# Altium PCB Ararinha_PCB.PcbDoc (part 1 of 2)
Units mm, origin at the board's own origin, x right, y up, seen from the top; angles counter-clockwise.
Board outline 118.49 x 71.75 mm, 4 copper layers (Component Side, GND, VCC, Solder Side), stack 0.844 mm thick; 218 components, 109 nets, 598 pads, 337 vias.
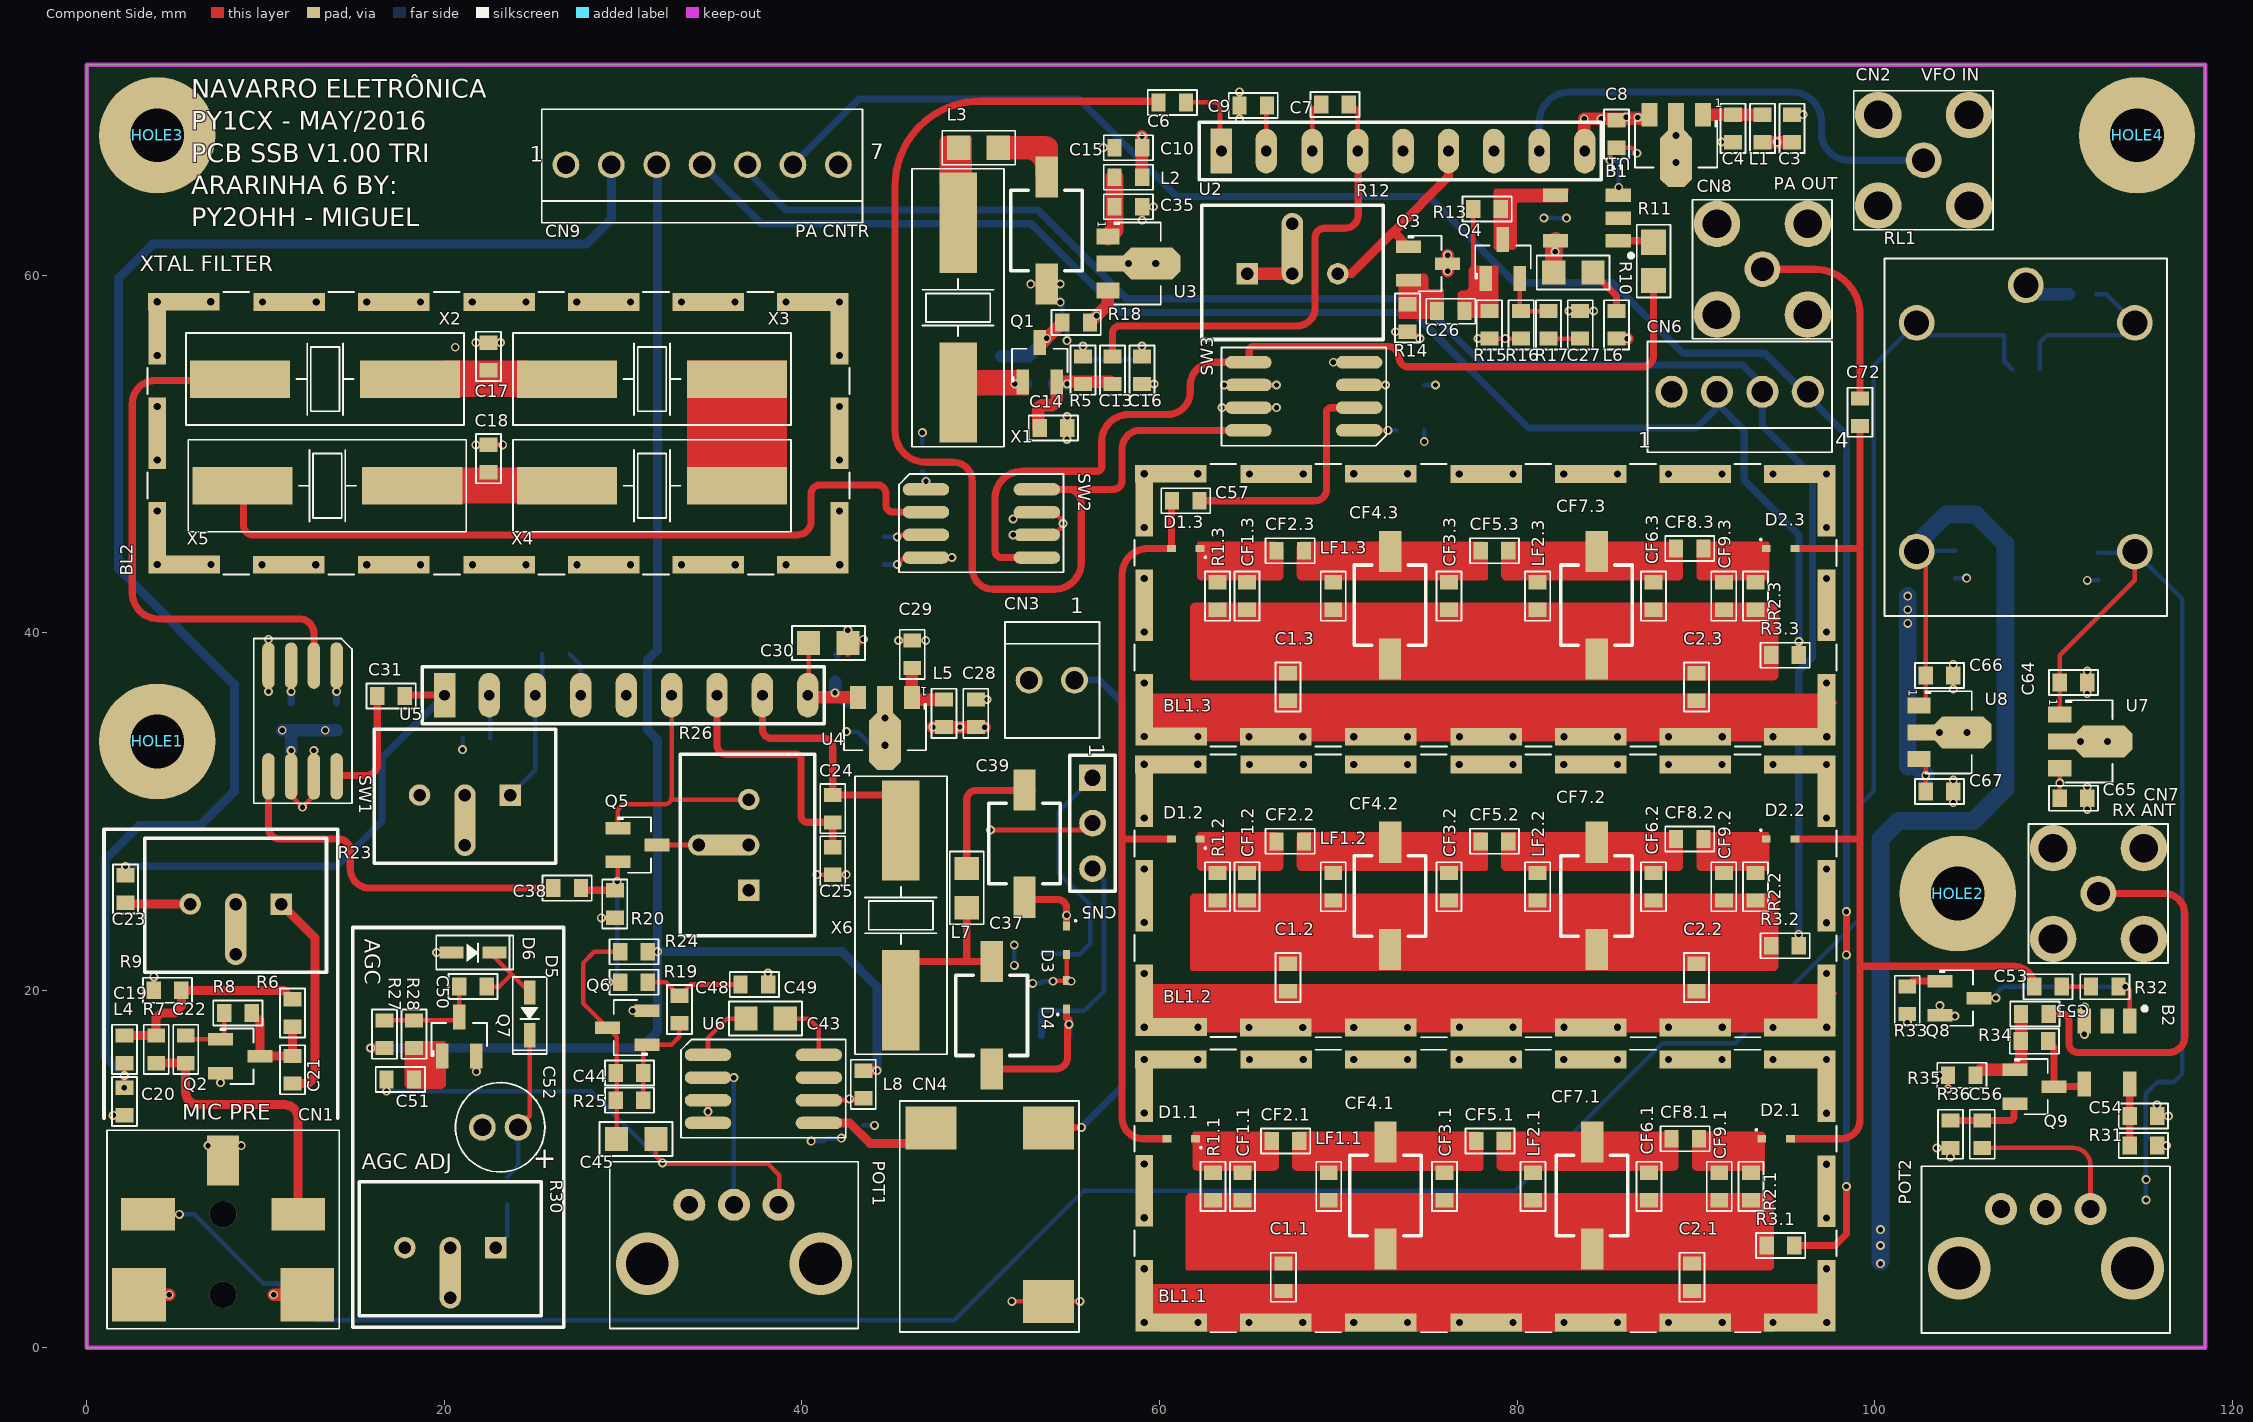
[diagram p0: Component Side view]
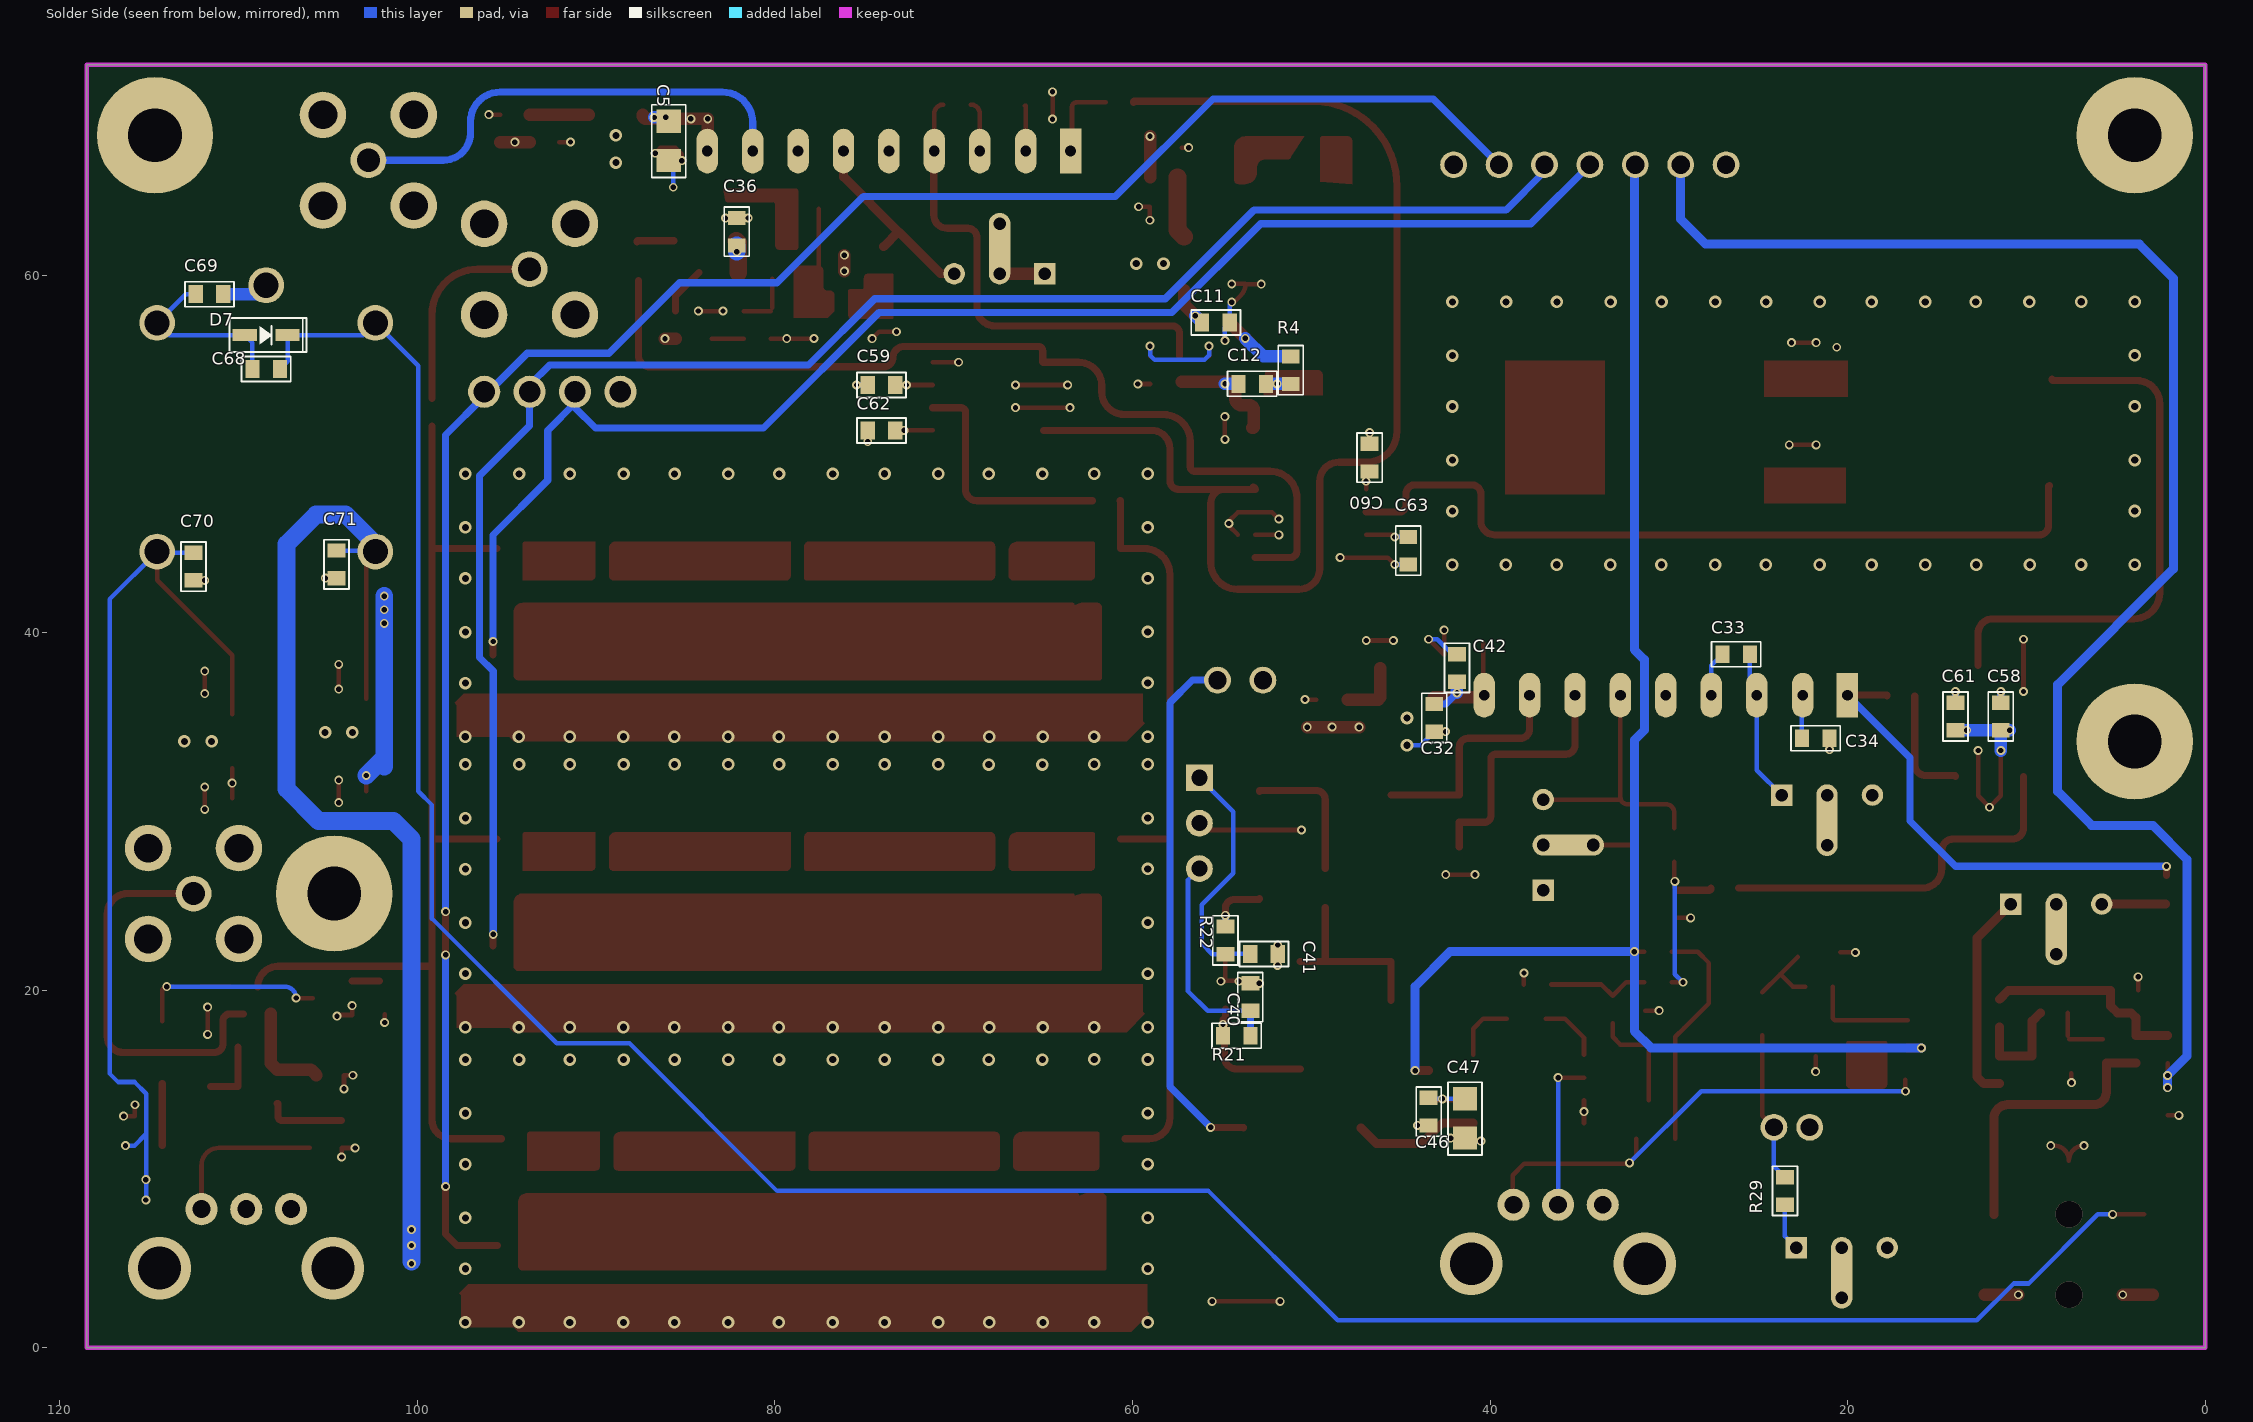
[diagram p1: Solder Side view, seen from below]
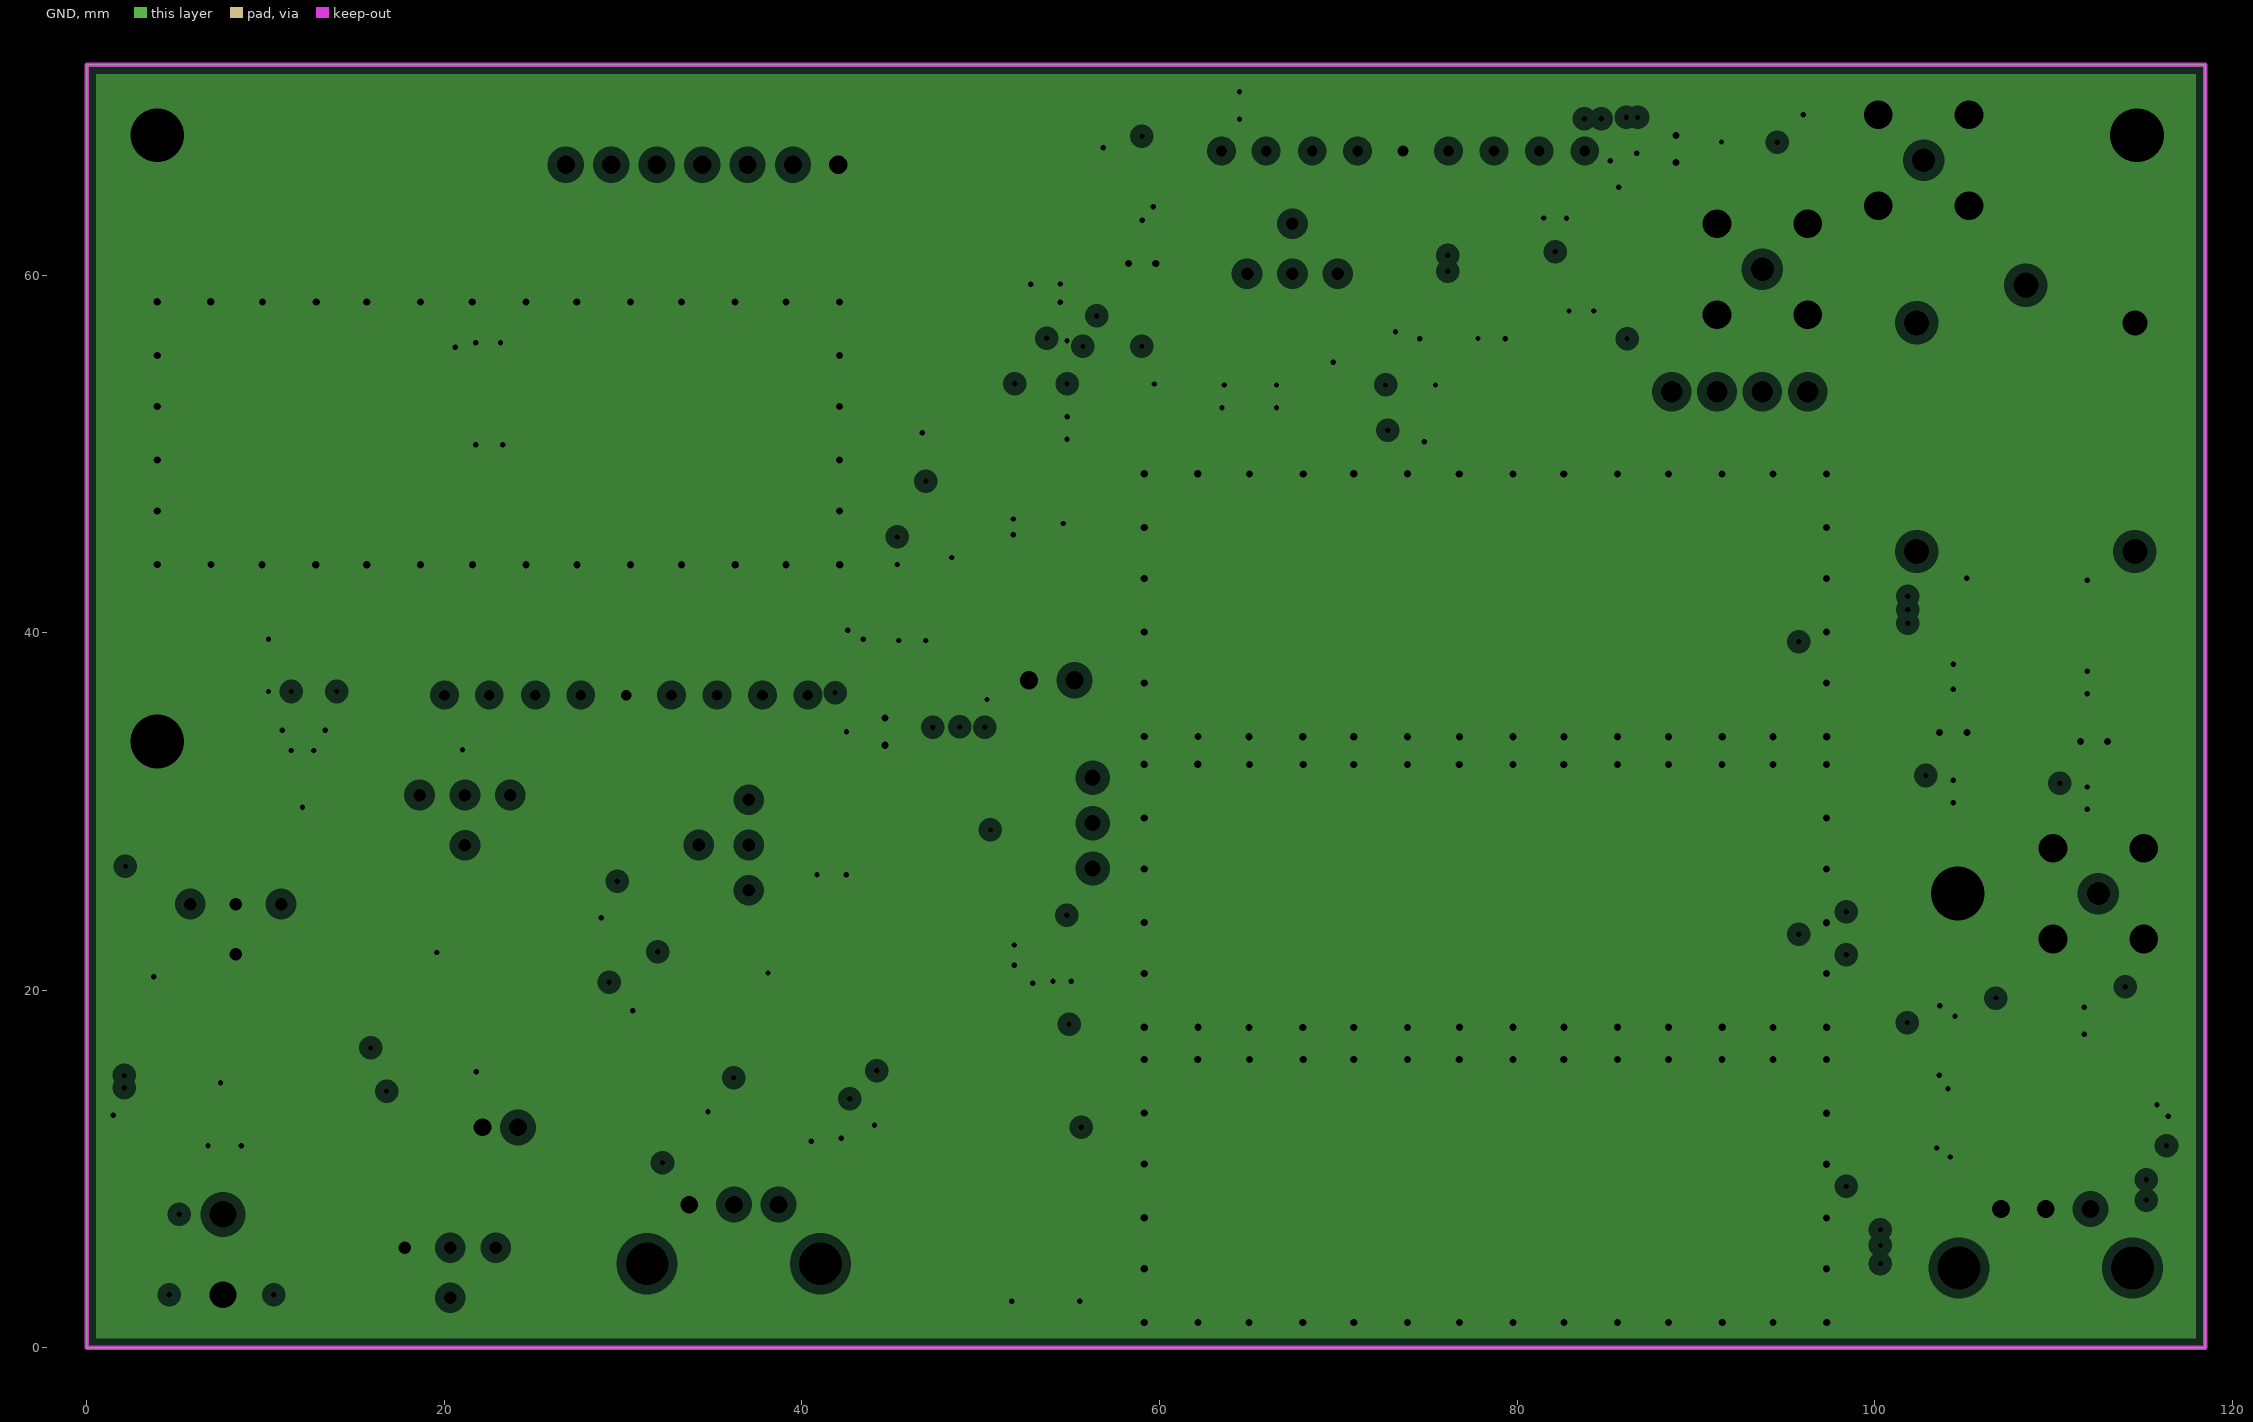
[diagram p2: GND, clearances drawn from the general rule]
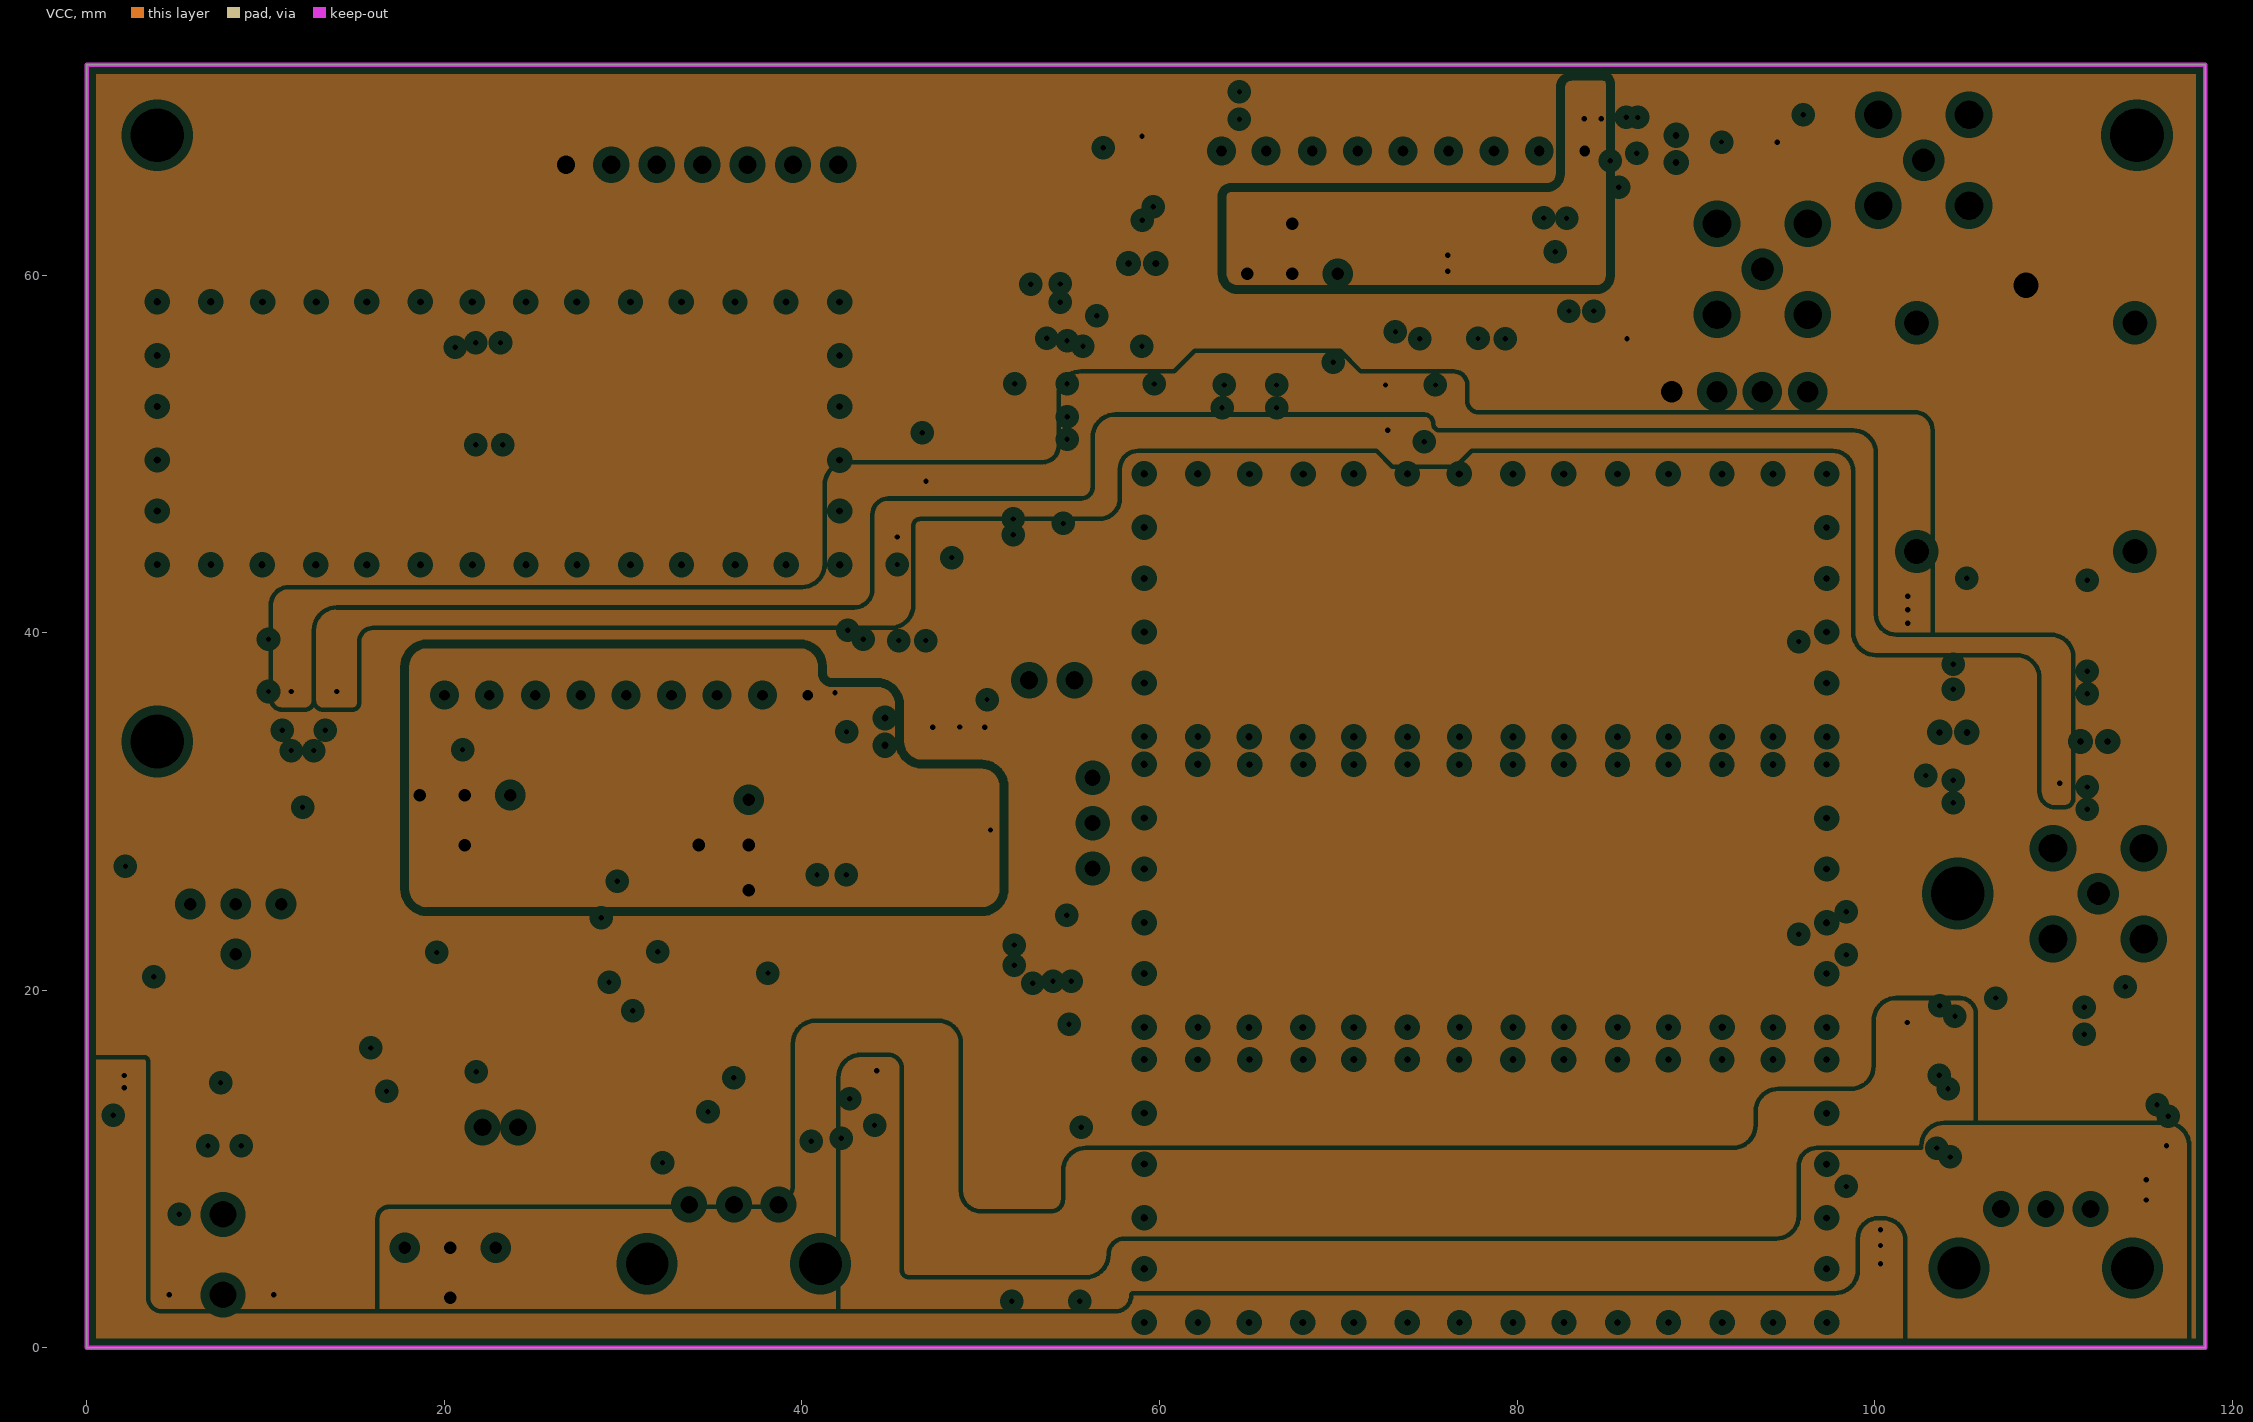
[diagram p3: VCC, clearances drawn from the general rule]

## Layer stack, top to bottom
Top Solder: solder mask 0.0102, Solder Resist, Dk 3.5
Component Side: signal copper 0.0356
Dielectric 1: core 0.32, FR-4, Dk 4.8
GND: plane copper 0.036, net GND
Dielectric 3: prepreg 0.127, Dk 4.2
VCC: plane copper 0.036, net (Multiple Nets)
Dielectric 4: core 0.254, Dk 4.2
Solder Side: signal copper 0.0356
Bottom Solder: solder mask 0.0102, Solder Resist, Dk 3.5

## Board outline
0,0 118.491,0 118.491,71.755 0,71.755

## Design rules (kind name [scope] priority, off if disabled: settings)
Clearance [HasFootprint('SHIELD_26.5X26.5')] p1: gap=0
Clearance Clearance_1 [All] p2: gap=0.254
HoleSize [All] p1: absolutevalues=TRUE maxlimit=5 minlimit=0.025 maxpercent=80.000 minpercent=20.000
MinimumSolderMaskSliver [All] p1 off: minsoldermaskwidth=0.254
PlaneClearance [All] p1: clearance=0.508
PlaneConnect [All] p1: planeconnectstyle=Direct reliefexpansion=0.508 reliefentries=4 reliefconductorwidth=0.254 reliefairgap=0.254
PolygonConnect [All] p1: connectstyle=Relief reliefconductorwidth=0.254 reliefentries=4 polygonreliefangle="90 Angle" airgapwidth=0.254
RoomDefinition XtalFilter [InComponentClass('XtalFilter')] p1: confinementstyle=ConfineIn formatcopy=TRUE lockcomponents=FALSE outline 1.559,42.384 43.596,42.384 43.596,61.434 1.559,61.434
RoutingVias [All] p1: holewidth=0.711 width=1.27 viastyle="Through Hole" minholewidth=0.711 minwidth=1.27 maxholewidth=0.711 maxwidth=1.27
SilkToSilkClearance [All] p1 off: silktosilkclearance=0.1
SilkToSolderMaskClearance [IsPad] p1 off: minsilkscreentomaskgap=0.1 clearancetoexposedcopper=TRUE
SolderMaskExpansion [All] p1: expansion=0.102
Width [All] p1: maxlimit=1 minlimit=0.254 preferedwidth=0.254 minimp=50.000000 maximp=50.000000 favimp=50.000000
24 further rules are at their usual default settings.

## Classes and differential pairs
net class CNTR[1..3]: CNTR1 CNTR2 CNTR3
channel class BPF: BPF1 BPF2 BPF3
component class BPF3: BL1.3 C1.3 C2.3 CF1.3 CF2.3 CF3.3 CF4.3 CF5.3 CF6.3 CF7.3 CF8.3 CF9.3 D1.3 D2.3 LF1.3 LF2.3 R1.3 R2.3 R3.3
component class BPF2: BL1.2 C1.2 C2.2 CF1.2 CF2.2 CF3.2 CF4.2 CF5.2 CF6.2 CF7.2 CF8.2 CF9.2 D1.2 D2.2 LF1.2 LF2.2 R1.2 R2.2 R3.2
component class BPF1: BL1.1 C1.1 C2.1 CF1.1 CF2.1 CF3.1 CF4.1 CF5.1 CF6.1 CF7.1 CF8.1 CF9.1 D1.1 D2.1 LF1.1 LF2.1 R1.1 R2.1 R3.1
component class IF: C19 C20 C21 C22 C23 C24 C25 C28 C29 C30 C31 C32 C33 C34 C37 C38 C39 C40 C41 C42 C43 C44 C45 C46 C47 C48 C49 C50 C51 C52 CN1 CN3 CN4 CN5 D3 D4 D5 D6 L4 L5 L7 L8 POT1 Q2 Q5 Q6 Q7 R6 R7 R8 R9 R19 R20 R21 R22 R23 R24 R25 R26 R27 R28 R29 R30 U4 U5 U6 X6
component class Mixer: B1 C3 C4 C5 C6 C7 C8 C9 C10 C11 C12 C13 C14 C15 C16 C26 C27 C35 C36 CN2 L1 L2 L3 L6 Q1 Q3 Q4 R4 R5 R10 R11 R12 R13 R14 R15 R16 R17 R18 U1 U2 U3 X1
component class XtalFilter: BL2 C17 C18 X2 X3 X4 X5
component class RX_Pre: B2 C53 C54 C55 C56 POT2 Q8 Q9 R31 R32 R33 R34 R35 R36
component class Block: C57 C58 C59 C60 C61 C62 C63 C72 CN6 CN7 CN8 CN9 HOLE1 HOLE2 HOLE3 HOLE4 SW1 SW2 SW3
component class Fonte: C64 C65 C66 C67 C68 C69 C70 C71 D7 RL1 U7 U8

## Components (designator, comment, footprint, x,y, rotation, side; value= is the part's Value field where it differs from the comment)
B1 "1:4CT" CX2047LANL 83.913,63.183 r180 top
B2 "1:4CT" CX2047LANL 113.006,16.508 r270 top
BL1.1 "Blindagem BPF" SHIELD_26.5X26.5 78.232,8.763 r180 top (schematic designator BL1)
BL1.2 "Blindagem BPF" SHIELD_26.5X26.5 78.232,25.273 r180 top (schematic designator BL1)
BL1.3 "Blindagem BPF" SHIELD_26.5X26.5 78.232,41.529 r180 top (schematic designator BL1)
BL2 "Blindagem BPF" SHIELD_26.5X26.5 23.022,51.147 r180 top
C1.1 "Capacitor Cerâmico" CC0603 66.929,3.937 r90 top (schematic designator C1)
C1.2 "Capacitor Cerâmico" CC0603 67.183,20.701 r90 top (schematic designator C1)
C1.3 "Capacitor Cerâmico" CC0603 67.183,36.957 r90 top (schematic designator C1)
C2.1 "Capacitor Cerâmico" CC0603 89.789,3.937 r90 top (schematic designator C2)
C2.2 "Capacitor Cerâmico" CC0603 90.043,20.701 r90 top (schematic designator C2)
C2.3 "Capacitor Cerâmico" CC0603 90.043,36.957 r90 top (schematic designator C2)
C3 "Capacitor Cerâmico" CC0603 95.377,68.199 r90 top
C4 "Capacitor Cerâmico" CC0603 92.075,68.199 r270 top
C5 "Capacitor Cerâmico" CC0805 85.945,67.501 r90 bottom
C6 "Capacitor Cerâmico" CC0603 60.718,69.652 r180 top
C7 "Capacitor Cerâmico" CC0603 69.816,69.533 r180 top
C8 "Capacitor Cerâmico" CC0603 85.564,67.882 r270 top
C9 "Capacitor Cerâmico" CC0603 65.244,69.479 r180 top
C10 "Capacitor Cerâmico" CC0603 58.259,67.12 r0 top
C11 "Capacitor Cerâmico" CC0603 55.338,57.341 r0 bottom
C12 "Capacitor Cerâmico" CC0603 53.306,53.912 r180 bottom
C13 "Capacitor Cerâmico" CC0603 57.37,54.674 r90 top
C14 "Capacitor Cerâmico" CC0603 54.068,51.445 r180 top
C15 "Trimmer" "MURATA TZB4" 53.687,62.489 r90 top
C16 "Capacitor Cerâmico" CC0603 59.021,54.674 r90 top
C17 "Capacitor Cerâmico" CC0603 22.47,55.447 r270 top
C18 "Capacitor Cerâmico" CC0603 22.47,49.732 r270 top
C19 "Capacitor Cerâmico" CC0603 4.514,19.988 r180 top
C20 "Capacitor Cerâmico" CC0603 2.101,13.765 r270 top
C21 "Capacitor Cerâmico" CC0603 11.499,15.543 r90 top
C22 "Capacitor Cerâmico" CC0603 5.53,16.686 r270 top
C23 "Capacitor Cerâmico" CC0603 2.159,25.654 r270 top
C24 "Capacitor Cerâmico" CC0603 41.725,30.148 r90 top
C25 "Capacitor Cerâmico" CC0603 41.725,27.227 r90 top
C26 "Capacitor Cerâmico" CC0603 76.293,57.976 r180 top
C27 "Capacitor Cerâmico" CC0603 83.532,57.214 r90 top
C28 "Capacitor Cerâmico" CC0603 49.726,35.482 r90 top
C29 "Capacitor Cerâmico" CC0603 46.17,38.784 r90 top
C30 "Capacitor Cerâmico" CC0805 41.471,39.419 r180 top
C31 "Capacitor Cerâmico" CC0603 17.018,36.449 r0 top
C32 "Capacitor Cerâmico" CC0603 43.122,35.228 r270 bottom
C33 "Capacitor Cerâmico" CC0603 26.231,38.784 r180 bottom
C34 "Capacitor Cerâmico" CC0603 21.786,34.085 r180 bottom
C35 "Capacitor Cerâmico" CC0603 58.259,63.818 r180 top
C36 "Capacitor Cerâmico" CC0603 82.135,62.421 r90 bottom
C37 "Trimmer" "MURATA TZB4" 50.615,18.591 r90 top
C38 "Capacitor Cerâmico" CC0603 26.866,25.703 r180 top
C39 "Trimmer" "MURATA TZB4" 52.451,28.194 r90 top
C40 "Capacitor Cerâmico" CC0603 53.409,19.607 r90 bottom
C41 "Capacitor Cerâmico" CC0603 52.647,22.02 r180 bottom
C42 "Capacitor Cerâmico" CC0603 41.852,38.022 r90 bottom
C43 "Capacitor Cerâmico" CC0805 37.973,18.408 r0 top
C44 "Capacitor Cerâmico" CC0603 30.353,15.36 r180 top
C45 "Capacitor Cerâmico" CC0805 30.734,11.677 r0 top
C46 "Capacitor Cerâmico" CC0603 43.434,13.201 r270 bottom
C47 "Capacitor Cerâmico" CC0805 41.402,12.82 r90 bottom
C48 "Capacitor Cerâmico" CC0603 33.147,18.916 r270 top
C49 "Capacitor Cerâmico" CC0603 37.338,20.313 r180 top
C50 "Capacitor Cerâmico" CC0603 21.598,20.199 r0 top
C51 "Capacitor Cerâmico" CC0603 17.534,14.992 r0 top
C52 "Capacitor Eletrolítico" CPOLRAD5X11 23.122,12.325 r180 top
C53 "Capacitor Cerâmico" CC0603 109.704,20.191 r0 top
C54 "Capacitor Cerâmico" CC0603 115.038,12.952 r180 top
C55 "Capacitor Cerâmico" CC0603 108.966,18.669 r0 top
C56 "Capacitor Cerâmico" CC0603 106.021,11.936 r90 top
C57 "Capacitor Cerâmico" CC0603 61.468,47.371 r180 top
C58 "Capacitor Cerâmico" CC0603 11.43,35.306 r90 bottom
C59 "Capacitor Cerâmico" CC0603 74.041,53.848 r180 bottom
C60 "Capacitor Cerâmico" CC0603 46.736,49.784 r270 bottom
C61 "Capacitor Cerâmico" CC0603 13.97,35.306 r90 bottom
C62 "Capacitor Cerâmico" CC0603 74.041,51.308 r180 bottom
C63 "Capacitor Cerâmico" CC0603 44.577,44.577 r90 bottom
C64 "Capacitor Cerâmico" CC0603 111.125,37.211 r180 top
C65 "Capacitor Cerâmico" CC0603 111.125,30.734 r180 top
C66 "Capacitor Cerâmico" CC0603 103.632,37.592 r180 top
C67 "Capacitor Cerâmico" CC0603 103.632,31.115 r180 top
C68 "Capacitor Cerâmico" CC0603 108.458,54.737 r180 bottom
C69 "Capacitor Cerâmico" CC0603 111.633,58.928 r180 bottom
C70 "Capacitor Cerâmico" CC0603 112.522,43.688 r90 bottom
C71 "Capacitor Cerâmico" CC0603 104.521,43.815 r90 bottom
C72 "Capacitor Cerâmico" CC0603 99.187,52.324 r270 top
CF1.1 "Capacitor Cerâmico" CC0603 64.643,9.017 r90 top (schematic designator CF1)
CF1.2 "Capacitor Cerâmico" CC0603 64.897,25.781 r90 top (schematic designator CF1)
CF1.3 "Capacitor Cerâmico" CC0603 64.897,42.037 r90 top (schematic designator CF1)
CF2.1 "Capacitor Cerâmico" CC0603 67.056,11.557 r180 top (schematic designator CF2)
CF2.2 "Capacitor Cerâmico" CC0603 67.31,28.321 r180 top (schematic designator CF2)
CF2.3 "Capacitor Cerâmico" CC0603 67.31,44.577 r180 top (schematic designator CF2)
CF3.1 "Capacitor Cerâmico" CC0603 75.946,9.017 r270 top (schematic designator CF3)
CF3.2 "Capacitor Cerâmico" CC0603 76.2,25.781 r270 top (schematic designator CF3)
CF3.3 "Capacitor Cerâmico" CC0603 76.2,42.037 r270 top (schematic designator CF3)
CF4.1 "Trimmer" "MURATA TZB4" 72.644,8.509 r90 top (schematic designator CF4)
CF4.2 "Trimmer" "MURATA TZB4" 72.898,25.273 r90 top (schematic designator CF4)
CF4.3 "Trimmer" "MURATA TZB4" 72.898,41.529 r90 top (schematic designator CF4)
CF5.1 "Capacitor Cerâmico" CC0603 78.486,11.557 r0 top (schematic designator CF5)
CF5.2 "Capacitor Cerâmico" CC0603 78.74,28.321 r0 top (schematic designator CF5)
CF5.3 "Capacitor Cerâmico" CC0603 78.74,44.577 r0 top (schematic designator CF5)
CF6.1 "Capacitor Cerâmico" CC0603 87.376,9.017 r90 top (schematic designator CF6)
CF6.2 "Capacitor Cerâmico" CC0603 87.63,25.781 r90 top (schematic designator CF6)
CF6.3 "Capacitor Cerâmico" CC0603 87.63,42.037 r90 top (schematic designator CF6)
CF7.1 "Trimmer" "MURATA TZB4" 84.201,8.509 r90 top (schematic designator CF7)
CF7.2 "Trimmer" "MURATA TZB4" 84.455,25.273 r90 top (schematic designator CF7)
CF7.3 "Trimmer" "MURATA TZB4" 84.455,41.529 r90 top (schematic designator CF7)
CF8.1 "Capacitor Cerâmico" CC0603 89.408,11.684 r180 top (schematic designator CF8)
CF8.2 "Capacitor Cerâmico" CC0603 89.662,28.448 r180 top (schematic designator CF8)
CF8.3 "Capacitor Cerâmico" CC0603 89.662,44.704 r180 top (schematic designator CF8)
CF9.1 "Capacitor Cerâmico" CC0603 91.313,9.017 r270 top (schematic designator CF9)
CF9.2 "Capacitor Cerâmico" CC0603 91.567,25.781 r270 top (schematic designator CF9)
CF9.3 "Capacitor Cerâmico" CC0603 91.567,42.037 r270 top (schematic designator CF9)
CN1 "SJ1-42534-SMT" CONN_JACK-P2_2.5-4N 7.62,5.207 r180 top
CN2 "Conn MCX" "CONN MCX MOLEX" 102.743,66.421 r0 top
CN3 "Conector KK" "CONN HDR2-POL P.100" 55.245,37.338 r0 top
CN4 "MJ-2523-SMT-TR" MJ-2523-SMT-TR 55.499,0.882 r90 top
CN5 "Header 3" "CONN HDR1X3" 56.261,31.877 r270 top
CN6 "Conector KK" "CONN HDR4-POL P.100" 93.726,53.467 r180 top
CN7 "Conn MCX" "CONN MCX MOLEX" 112.522,25.4 r0 top
CN8 "Conn MCX" "CONN MCX MOLEX" 93.726,60.325 r0 top
CN9 "Conector KK" "CONN HDR7-POL P.100" 34.417,66.167 r180 top
D1.1 "BAP64" SOD523 61.214,11.684 r180 top (schematic designator D1)
D1.2 "BAP64" SOD523 61.468,28.448 r180 top (schematic designator D1)
D1.3 "BAP64" SOD523 61.468,44.704 r180 top (schematic designator D1)
D2.1 "BAP64" SOD523 94.488,11.684 r0 top (schematic designator D2)
D2.2 "BAP64" SOD523 94.742,28.448 r0 top (schematic designator D2)
D2.3 "BAP64" SOD523 94.742,44.704 r0 top (schematic designator D2)
D3 "BAP64" SOD523 54.806,19.734 r90 top
D4 "BAP64" SOD523 54.806,22.782 r270 top
D5 "1N4148" "SOD-323 DIODO-K2" 24.773,18.675 r270 top
D6 "1N4148" "SOD-323 DIODO-K2" 21.598,22.104 r0 top
D7 "1N4148" "SOD-323 DIODO-K2" 108.458,56.642 r180 bottom
HOLE1 "Furo de Fixação" FURO_M3 3.937,33.909 r0 top
HOLE2 "Furo de Fixação" FURO_M3 104.648,25.4 r0 top
HOLE3 "Furo de Fixação" FURO_M3 3.937,67.818 r0 top
HOLE4 "Furo de Fixação" FURO_M3 114.681,67.818 r0 top
L1 "Bead" CC0603 93.726,68.199 r90 top
L2 "Bead" CC0603 58.259,65.469 r180 top
L3 "Indutor" CC0805 49.877,67.12 r180 top
L4 "Bead" CC0603 2.101,16.686 r270 top
L5 "Bead" CC0603 47.948,35.482 r90 top
L6 "Bead" CC0603 85.564,57.214 r90 top
L7 "Indutor" CC0805 49.218,25.703 r270 top
L8 "Bead" CC0603 43.434,14.725 r90 top
LF1.1 "Bead" CC0603 69.469,9.017 r90 top (schematic designator LF1)
LF1.2 "Bead" CC0603 69.723,25.781 r90 top (schematic designator LF1)
LF1.3 "Bead" CC0603 69.723,42.037 r90 top (schematic designator LF1)
LF2.1 "Bead" CC0603 80.899,9.017 r90 top (schematic designator LF2)
LF2.2 "Bead" CC0603 81.153,25.781 r90 top (schematic designator LF2)
LF2.3 "Bead" CC0603 81.153,42.037 r90 top (schematic designator LF2)
POT1 "Potenciômetro" "POT - PTV09" 36.195,7.994 r270 top
POT2 "Potenciômetro" "POT - PTV09" 109.577,7.745 r270 top
Q1 "MMBT2222" SOT-23-3N 53.306,55.123 r90 top
Q2 "MMBT3904" SOT-23-3N 8.578,16.305 r0 top
Q3 "2SC3324" SOT-23-3N 75.023,60.643 r0 top
Q4 "2SC3324" SOT-23-3N 79.214,60.897 r90 top
Q5 "2SC3324" SOT-23-3N 30.803,28.116 r0 top
Q6 "MMBT3904" SOT-23-3N 30.226,17.9 r180 top
Q7 "MMBT2222" SOT-23-3N 20.836,17.405 r90 top
Q8 "MMBT3904" SOT-23-3N 104.751,19.556 r0 top
Q9 "2SC3324" SOT-23-3N 108.942,14.603 r0 top
R1.1 "Resistor" CC0603 62.992,9.017 r90 top (schematic designator R1)
R1.2 "Resistor" CC0603 63.246,25.781 r90 top (schematic designator R1)
R1.3 "Resistor" CC0603 63.246,42.037 r90 top (schematic designator R1)
R2.1 "Resistor" CC0603 93.091,9.017 r90 top (schematic designator R2)
R2.2 "Resistor" CC0603 93.345,25.781 r90 top (schematic designator R2)
R2.3 "Resistor" CC0603 93.345,42.037 r90 top (schematic designator R2)
R3.1 "Resistor" CC0603 94.742,5.715 r0 top (schematic designator R3)
R3.2 "Resistor" CC0603 94.996,22.479 r0 top (schematic designator R3)
R3.3 "Resistor" CC0603 94.996,38.735 r0 top (schematic designator R3)
R4 "Resistor" CC0603 51.147,54.674 r90 bottom
R5 "Resistor" CC0603 55.719,54.674 r270 top
R6 "Resistor" CC0603 11.499,18.718 r90 top
R7 "Resistor" CC0603 3.879,16.686 r90 top
R8 "Resistor" CC0603 8.451,18.718 r0 top
R9 "Potenciômetro" POT 8.324,24.814 r180 top
R10 "Resistor" CC0805 83.151,60.135 r0 top
R11 "Resistor" CC0603~0805 87.642,60.762 r270 top
R12 "Potenciômetro" POT 67.437,60.071 r0 top
R13 "Resistor" CC0603 78.325,63.691 r0 top
R14 "Resistor" CC0603 73.88,57.595 r90 top
R15 "Resistor" CC0603 78.452,57.214 r90 top
R16 "Resistor" CC0603 80.23,57.214 r90 top
R17 "Resistor" CC0603 81.754,57.214 r90 top
R18 "Resistor" CC0603 55.338,57.341 r0 top
R19 "Resistor" CC0603 30.607,20.44 r0 top
R20 "Resistor" CC0603 29.533,24.814 r90 top
R21 "Resistor" CC0603 54.171,17.448 r0 bottom
R22 "Resistor" CC0603 54.806,22.782 r270 bottom
R23 "Potenciômetro" POT 21.151,30.91 r180 top
R24 "Resistor" CC0603 30.607,22.147 r0 top
R25 "Resistor" CC0603 30.353,13.836 r180 top
R26 "Potenciômetro" POT 37.026,28.116 r90 top
R27 "Resistor" CC0603 16.645,17.532 r270 top
R28 "Resistor" CC0603 18.296,17.532 r90 top
R29 "Resistor" CC0603 23.503,8.769 r270 bottom
R30 "Potenciômetro" POT 20.328,5.594 r180 top
R31 "Resistor" CC0603 115.038,11.301 r0 top
R32 "Resistor" CC0603 112.879,20.191 r180 top
R33 "Resistor" CC0603 101.83,19.429 r270 top
R34 "Resistor" CC0603 108.942,17.143 r0 top
R35 "Resistor" CC0603 104.878,15.238 r0 top
R36 "Resistor" CC0603 104.243,11.936 r90 top
RL1 "Rele" "RELE SPDT" 108.458,50.927 r0 top
SW1 "MASWSS0180" SOIC-8N 12.065,35.052 r270 top
SW2 "MASWSS0180" SOIC-8N 50.038,46.101 r0 top
SW3 "MASWSS0180" SOIC-8N 68.072,53.213 r180 top
U1 "MC78L05A" SOT-89-3N 88.9,67.31 r270 top
U2 "TA7358" SIP9 63.466,66.934 r90 top
U3 "MC78L05A" SOT-89-3N 58.767,60.643 r0 top
U4 "MC78L05A" SOT-89-3N 44.646,34.72 r270 top
U5 "TA7358" SIP9 20.008,36.498 r90 top
U6 "LM386" SOIC-8N 37.846,14.471 r0 top
U7 "MC78L05A" SOT-89-3N 112.014,33.909 r0 top
U8 "MC78L05A" SOT-89-3N 104.14,34.417 r0 top
X1 "10MHz" HC/49US 48.734,58.171 r270 top
X2 "10MHz" HC/49US 13.326,54.177 r0 top
X3 "10MHz" HC/49US 31.614,54.177 r0 top
X4 "10MHz" HC/49US 31.614,48.208 r180 top
X5 "10MHz" HC/49US 13.453,48.208 r180 top
X6 "10MHz" HC/49US 45.535,24.179 r90 top

## Footprints (in the part's own frame and the unit in brackets; to place one, negate y for a bottom-side part, rotate by r counter-clockwise, add the part's x,y. Pads: shape width x height; smd on the part's side, far side on the other; paste and mask are expansions set on the pad)
CC0603 [mm] "Chip Resistor, 2-Leads, Body 1,6x0,8mm, IPC Medium Density"
  rect 0.8x1 smd: 1(-0.77,0) 2(0.77,0)
  silkscreen extent -1.38,-0.7 1.38,0.7, body extent -0.8,-0.42 0.8,0.43, height 0.45
CC0603~0805 [mm] "Chip Resistor, 2-Leads, Body 2,0x1,2mm, IPC Medium Density"
  rect 1.4x1.4 smd: 1(-1.07,0) 2(1.07,0)
  silkscreen extent -2.05,-0.95 2.03,0.95, body extent -0.82,-0.43 0.82,0.43, height 0.8
CC0805 [mm] "Chip Resistor, 2-Leads, Body 2,0x1,2mm, IPC Medium Density"
  rect 1.3x1.35 smd: 1(-1.1,0) 2(1.1,0)
  silkscreen extent -2.05,-0.95 2.03,0.95, body extent -1,-0.63 1,0.63, height 0.6
"CONN HDR1X3" [mm] "Connector; Header; 3 Position"
  rect 1.5x1.5 hole 0.9: 1(0,0)
  round 1.5 hole 0.9: 2(2.54,0) 3(5.08,0)
  silkscreen extent -1.27,-1.27 6.35,1.27, body extent -1.27,-1.27 6.35,1.27, height 8.49
"CONN HDR2-POL P.100" [mm] "Conector KK Macho, Pitch 2.54mm, 2 Polos"
  round 1.5 hole 1.02: 1(0,0) 2(-2.54,0)
  silkscreen extent -3.89,-3.23 1.4,3.25, body extent -3.82,-3.12 1.26,3.23, height 10.69
"CONN HDR4-POL P.100" [mm] "Conector KK Macho, Pitch 2.54mm, 4 Polos"
  round 1.8 hole 1.2: 1(5.08,0) 2(2.54,0) 3(0,0) 4(-2.54,0)
  silkscreen extent -3.89,-2.81 6.43,3.38, body extent -3.49,-2.71 6.01,3.29, height 12
"CONN HDR7-POL P.100" [mm] "Conector KK Macho, Pitch 2.54mm, 7 Polos"
  round 1.5 hole 1.02: 1(7.62,0) 2(5.08,0) 3(2.54,0) 4(0,0) 5(-2.54,0) 6(-5.08,0) 7(-7.62,0)
  silkscreen extent -8.97,-3.11 8.97,3.25, body extent -8.57,-2.71 8.55,3.29, height 12
"CONN MCX MOLEX" [mm]
  round 2 hole 1.3: 1(0,0)
  round 2.6 hole 1.6: 2(2.54,-2.54) 3(2.54,2.54) 4(-2.54,2.54) 5(-2.54,-2.54)
  silkscreen extent -3.91,-3.89 3.89,3.89, body extent -3,-3 3,3, height 5.6
CONN_JACK-P2_2.5-4N [mm] "Conector P2 de audio para 4 contatos, SMD, Horizontal"
  rect 1.8x2.8 smd: 1(0,-5.25)
  rect 3x1.8 smd: 2(-4.2,-2.25) 3(4.2,-2.25)
  rect 3x3 smd: 4(-4.7,2.25) 4(4.7,2.25)
  silkscreen extent -6.5,-6.95 6.5,4.15, body extent -4,-5.25 4,6.75, height 5
CPOLRAD5X11 [mm]
  round 1.5 hole 1: 1(-1,0) 2(1,0)
  silkscreen extent -2.5,-2.5 2.5,2.5, body extent -2.5,-2.5 2.49,2.5, height 11.01
CX2047LANL [mm] "1:4 BALUN PULSE ELECTRONICS"
  rect 1.4x0.75 smd: 1(-1.75,1.27) 2(-1.75,0) 3(-1.75,-1.27) 4(1.75,-1.27) 6(1.75,1.27)
  silkscreen extent -2.53,2.03 -2.38,2.18, body extent -1.91,-1.59 1.91,1.59, height 3.08
FURO_M3 [mm] "Furo metalizado para parafuso M3"
  round 6.5 hole 3 paste+0: X(0,0)
  body extent -2.8,-2.8 2.8,2.8, height 2.38
HC/49US [mm] "Crystal, 2-Leads, Body 11,5x4,7mm, IPC Low Density"
  rect 5.6x2.1 smd: 1(-4.75,0) 2(4.75,0)
  silkscreen extent -7.77,-2.58 7.78,2.58, body extent -6.15,-2.25 6.15,2.25, height 5.18
MJ-2523-SMT-TR [mm] "CONN AUDIO JACK MONO 2.5MM SMD"
  rect 2.4x2.85 smd: 1(1.707,1.709) 2(11.407,8.273) 3(11.407,1.709)
  silkscreen extent 0,0 12.91,10.02, body extent -1.53,1.08 11.97,9.08, height 4.6
"MURATA TZB4" [mm]
  rect 2.3x1.25 smd: 1(-3,0) 2(3,-0.001)
  silkscreen extent -2.25,-2 2.25,2, body extent -3.49,-2.1 3.56,2.1, height 3.2
POT [mm] "Thru-Hole; 3 Leads"
  rect 1.2x1.2 hole 0.7: 1(-2.54,0)
  oval 1.2x4 hole 0.7 copper offset 0,1.4: 2(0,0)
  round 1.2 hole 0.7: 3(2.54,0)
  silkscreen extent -5.08,-3.68 5.08,3.82, body extent -4.6,-2.41 4.6,2.39, height 12.01
"POT - PTV09" [mm] "Trimmer Through Hole"
  round 1.8 hole 1: 1(0,2.5) 2(0,0) 3(0,-2.5)
  silkscreen extent -2.4,-6.95 6.93,6.95, body extent -1.94,-4.67 20.12,4.82, height 11.3
"RELE SPDT" [mm]
  round 2 hole 1.4: 1(6.1,6.4) 2(-6.1,-6.4) 3(0,8.5) 4(6.1,-6.4) 5(-6.1,6.4)
  silkscreen extent -7.9,-10 7.9,10, body extent -7.9,-10 7.9,10, height 15
SHIELD_26.5X26.5 [mm] "Blindagem tipo gaiola de 26.5mm x 26.5mm"
  rect 1x4 smd: 1(-19.085,-5.847) 1(-19.085,0.002) 1(-19.085,5.852) 1(19.085,-0.002) 1(19.085,-5.852) 1(19.085,5.847)
  rect 4x1 smd: 1(-17.594,7.356) 1(-17.585,-7.348) 1(-11.745,7.356) 1(-11.735,-7.348) 1(-5.895,7.356) 1(-5.885,-7.348) 1(-0.045,7.356) 1(-0.035,-7.348) 1(5.867,-7.353) 1(5.867,7.356) 1(11.69,-7.345) 1(11.717,7.356) 1(17.585,7.348) 1(17.594,-7.356)
  silkscreen extent -19.64,-7.91 19.64,7.91, body extent -19.64,-7.9 19.59,7.91, height 7
SIP9 [mm]
  rect 2.5x1.2 hole 0.6: 1(0,0)
  oval 2.5x1.2 hole 0.6: 2(0,-2.5) 3(0,-5.08) 4(0,-7.62) 5(0,-10.16) 6(0,-12.7) 7(0,-15.24) 8(0,-17.78) 9(0,-20.32)
  silkscreen extent -1.6,-21.25 1.6,1.25, body extent -1.29,-21.32 1.25,1.03, height 6.86
SOD523 [mm]
  rect 0.5x0.4 smd: 1(-0.8,0) 2(0.8,0)
  silkscreen extent -1.15,0.45 -1.05,0.55, body extent -0.8,-0.4 0.8,0.4, height 0.7
"SOD-323 DIODO-K2" [mm] "Molded Diode, 2-Leads, Body 1,7x1,3mm, IPC Medium Density, Cathode on pin 2"
  rect 1.35x0.65 smd: 1(-1.2,0) 2(1.2,0)
  silkscreen extent -2.05,-0.95 2.25,0.95, body extent -1.28,-0.68 1.42,0.67, height 0.79
SOIC-8N [mm] "SOIC, 8-Leads, Body 4.9x3.9mm, Pitch 1.27mm, IPC Medium Density"
  oval 2.6x0.7 smd: 1(-3.1,1.905) 2(-3.1,0.635) 3(-3.1,-0.635) 4(-3.1,-1.905) 5(3.1,-1.905) 6(3.1,-0.635) 7(3.1,0.635) 8(3.1,1.905)
  silkscreen extent -4.61,-2.73 4.6,2.76, body extent -2.9,-2.4 2.9,2.4, height 1.75
SOT-23-3N [mm] "SOT23, 3-Leads, Body 3,1x2,7mm (max), Pitch 0,95mm, IPC Medium Density"
  rect 1.4x0.7 smd: 1(-1.1,0.95) 2(-1.1,-0.95) 3(1.1,0)
  silkscreen extent -1.1,-1.55 0.75,1.55, body extent -1.4,-1.45 1.4,1.45, height 1.25
SOT-89-3N [mm] "SOT89, 3-Leads, Body 4,5x2,4mm (max), Pitch 1,50mm, Lead Span 4,1mm, IPC High Density"
  rect 1.3x0.9 smd: 1(-1.65,1.5) 3(-1.65,-1.5)
  rect 1.5x0.9 smd: 2(-1.55,0)
  oct 3.2x1.8 smd: 2(0.8,0)
  silkscreen extent -1.3,-2.3 1.3,2.3, body extent -2.18,-2.25 1.75,2.25, height 1.4

## Part data
B1 B2: library part "BALUN CX2047LANL", "Balun 4CT:1"
C1.1 C1.2 C1.3 C2.1 C2.2 C2.3 C57 C58 C59 C60 C61 C62 C63 C64 C65 C66 C67 C68 C69 C70 C71: library part "Cap 100nF 50V 0603 X7R", "Capacitor (Semiconductor SIM Model)"
C3 C4 C6 C7 C8 C10 C11 C16 C19 C20 C21 C22 C23 C26 C27 C28 C29 C31 C32 C33 C35 C36 C38 C40 C41 C42 C46 C48 C50 C51 C53 C54 C55 C56: library part "Cap 100nF 25V 0603 X7R", "Capacitor (Semiconductor SIM Model)"
C5 C30: library part "Cap 10uF 16V 0805 X6S LOESR", "Capacitor (Semiconductor SIM Model)"
C9 C34 C44: library part "Cap 1nF 50V 0603 NP0", "Capacitor (Semiconductor SIM Model)"
C12 C14 C24 C25: library part "Cap 220pF 50V 0603 NP0", "Capacitor (Semiconductor SIM Model)"
C13: library part "Cap 2.2pf 50V 0603 C0G", "Capacitor (Semiconductor SIM Model)"
C15 C37 C39 CF4.1 CF4.2 CF4.3 CF7.1 CF7.2 CF7.3: library part "Trimmer 7-50pF 50V TZB4-BB", "Capacitor (Semiconductor SIM Model)"
C17 C18 C72: library part "Cap 100pF 100V 0603 NP0", "Capacitor (Semiconductor SIM Model)"
C43 C45 C47: library part "Cap 10uF 25V 0805 X5R", "Capacitor (Semiconductor SIM Model)"
C49: library part "Cap 4.7nF 50V 0603 X7R", "Capacitor (Semiconductor SIM Model)"
C52: library part "PCap 47uF 35V 5d.x11h.", "Polarized Capacitor (Radial)"
CF1.1 CF1.2 CF1.3 CF2.1 CF2.2 CF2.3 CF3.1 CF3.2 CF3.3 CF5.1 CF5.2 CF5.3 CF6.1 CF6.2 CF6.3 CF8.1 CF8.2 CF8.3 CF9.1 CF9.2 CF9.3: library part "Cap - $Val $V $Footprint $Classe_1", "Capacitor (Semiconductor SIM Model)"
CN1: library part Jack-4Pol, "Jack Socket, SMD Vertical, 4-Conductor Open Circuit"
CN2 CN7 CN8: "Conector MCX"
CN3: library part "KK 2P Macho-V P2.54mm"
CN4: "CONN AUDIO JACK MONO 2.5MM SMD"
CN5: "Header, 3-Pin"
CN6: library part "KK 4P Macho-V P2.54mm"
CN9: library part "KK 7P Macho-V P2.54mm"
D1.1 D1.2 D1.3 D2.1 D2.2 D2.3 D3 D4: library part "PIN BAP64", "PIN DIODE"
D5 D6 D7: library part "DP 75V 150mA SOD-323", "Small Signal Diodes"
HOLE1 HOLE2 HOLE3 HOLE4: library part Parafuso, "Furo para parafuso"
L1 L2 L4 L5 L6 LF1.1 LF1.2 LF1.3 LF2.1 LF2.2 LF2.3: library part "Bd 1K@100MHz 0603 400mA"
L3 L7: library part "Ind 10uH 0805 150mA", "Inductor"
L8: library part "Bd 60R@100MHz 0603 500mA"
POT1 POT2: library part "POT 100k Audio", "Potenciometro"
Q1 Q7: library part "TRS MMBT2222 40V 200mA SOT-23-3N", "NPN General Purpose Amplifier"
Q2 Q6 Q8: library part "TRS MMBT3904 40V 200mA SOT-23-3N", "NPN General Purpose Amplifier"
Q3 Q4 Q5 Q9: library part "TRS 2SC3324 120V 100mA SOT-23-3", "NPN General Purpose Amplifier"
R1.1 R1.2 R1.3 R2.1 R2.2 R2.3 R5 R15 R21 R22 R35: library part "Res 1K 1% 0603 1/10W"
R3.1 R3.2 R3.3 R31: library part "Res 100R 5% 0603 1/10W"
R4: library part "Res 33K 1% 0603 1/10W"
R6 R24 R27: library part "Res 4K7 1% 0603 1/10W"
R7: library part "Res 10K 1% 0603 1/10W"
R8 R25 R28 R29: library part "Res 100K 1% 0603 1/10W"
R9: library part "Res Trim", "Trimmer"
R10: library part "Res 100R 5% 0805 1/8W"
R11: library part "Res 0R 0603 1/10W"
R12 R23 R26 R30: library part "Res Pot", "Potenciometro"
R13 R19 R32 R33 R34: library part "Res 2K2 5% 0603 1/10W"
R14 R20: library part "Res 560R 1% 0603 1/10w"
R16 R36: library part "Res 180R 1% 0603 1/10W"
R17: library part "Res 4R7 1% 0603 1/10W"
R18: library part "Res 390R 1% 0603 1/10W"
RL1: library part "Rele SPDT", "Rele de uma chave e dois contatos"
SW1 SW2 SW3: "GaAs SPDT Terminated Switch  DC - 2.5 GHz"
U1 U3 U4 U7 U8: library part MC78L05, "Regulador Linear 5V"
U2 U5: "FM FRONT-END"
U6: "IC AMP AUDIO PWR .325W AB 8SOIC"
X1 X2 X3 X4 X5 X6: library part XTAL, "Crystal Oscillator"

## Via types
v1: diameter 0.5, hole 0.3, Component Side to Solder Side, 164 vias
v2: diameter 0.7, hole 0.4, Component Side to Solder Side, tented both sides, 162 vias
v3: diameter 1.2, hole 0.7, Component Side to Solder Side, 5 vias
v4: diameter 3.5, hole 2.4, Component Side to Solder Side, tented both sides, 4 vias
v5: diameter 1.5, hole 1.5, Component Side to Solder Side, tented both sides, 2 vias

## Nets (pads, with @x,y where several pads share a name; then routed paths per layer and width w, separated by ;. In a path a pad name is that pad's centre, name@x,y a point inside that pad or via, vN(x,y) a via of type N, cw(c..) or ccw(c..) an arc to the next point about the centre after c; other vN are vias at no path point)
5V_IF: C30.2 C32.1 C42.1 CN5.2 Q5.3 R23.2 R23.3 R26.1 R26.2 U4.3 U5.9 | length 18.6
  Component Side w0.254: Q5.3@31.903,28.116 R26.2@36.772,28.116 ; U5.9@40.371,36.541 C30.2@40.371,39.419 ; v1(50.546,28.956) 55.88,28.956 CN5.2@56.261,29.337
  Component Side w0.7: U5.9@40.328,36.37 U4.3@43.146,36.37
  Solder Side w0.4: v1(41.852,36.625) 42.479,35.998 C32.1@43.122,35.998
  Solder Side w0.7: v1(41.852,36.625) C42.1@41.852,37.252
  other v3: 21.151,28.11 34.226,28.116
5V_MIXER: C5.2 C8.1 Q3.3 R12.1 R12.2 U1.3 U2.9 | length 10.3
  Component Side w0.7: R12.1@64.897,60.071 R12.2@67.437,60.071 ; v1(76.123,60.219) v1(76.123,61.108) ; U2.9@83.762,66.558 U2.9@83.762,66.958 ; U2.9@83.786,66.934 cw(c83.786,66.958) U2.9@83.762,66.958 ; U1.3@87.4,68.96 cw(c87.173,68.96) 87.173,68.733 v1(83.762,68.733) U2.9@83.762,66.958
  Solder Side w0.7: C5.2@85.945,68.601 86.157,68.813 v1(86.762,68.813)
  other v1: 84.709,68.733 86.106,68.834
  other v3: 67.437,62.871
12V: C3.1 C10.2 C28.1 C69.2 CN1.4 CN6.1 CN9.1 L1.1 L2.1 L5.1 L6.1 RL1.3 | length 12.9
  Component Side w0.7: CN1.4@2.92,2.957 v1(4.608,2.957) ; v1(10.45,2.957) CN1.4@12.32,2.957 ; v1(47.321,34.712) L5.1@47.948,34.712 C28.1@49.726,34.712 v1(50.226,34.712) ; L2.1@59.021,65.477 v1(59.021,67.755) ; L6.1@85.564,56.444 v1(86.153,56.444) ; L1.1@93.726,67.429 C3.1@95.377,67.429
  Solder Side w0.7: RL1.3@108.957,58.928 C69.2@110.863,58.928
  other v1: 48.837,34.72 94.552,67.429
AGC: C45.2 C51.1 POT1.1 | length 27.7
  Component Side w0.254: v1(16.764,14.342) C51.1@16.764,14.992 ; C45.2@31.834,11.677 31.834,10.704 32.258,10.28 38.1,10.28 38.735,9.645 38.735,8.034 POT1.1@38.695,7.994
  Solder Side w0.254: v1(16.764,14.342) 28.194,14.342 v1(32.2,10.336)
AOUT: C48.1 C49.2 R19.2 | length 5.8
  Component Side w0.254: R19.2@31.377,20.44 32.393,20.44 C48.1@33.147,19.686 33.774,20.313 C49.2@36.568,20.313
BF_CW_OUT: C7.1 C13.2 U2.4 | length 27
  Component Side w0.254: C7.1@70.586,69.533 cw(c70.586,69.033) 71.086,69.033 U2.4@71.086,66.934
  Component Side w0.4: C13.2@57.37,55.444 57.37,56.735 cw(c57.785,56.735) 57.785,57.15 67.691,57.15 ccw(c67.691,58.166) 68.707,58.166 68.707,62.103 cw(c69.215,62.103) 69.215,62.611 70.358,62.611 ccw(c70.358,63.373) 71.12,63.373 71.12,66.899 ccw(c71.086,66.899) U2.4@71.086,66.934
BPFA: C57.2 D1.1.2 D1.2.2 D1.3.2 | length 42.6
  Component Side w0.4: D1.1.2@60.414,11.684 59.076,11.684 cw(c59.076,12.848) 57.912,12.848 57.912,28.448 ; D1.2.2@60.668,28.448 57.912,28.448 ; C57.2@60.698,47.371 ccw(c60.698,47.341) 60.668,47.341 D1.3.2@60.668,44.704 59.369,44.704 ccw(c59.369,43.247) 57.912,43.247 57.912,28.448
BPFB: C53.1 C72.2 D2.1.2 D2.2.2 D2.3.2 | length 61
  Component Side w0.4: D2.1.2@95.288,11.684 98.112,11.684 ccw(c98.112,12.759) 99.187,12.759 99.187,28.448 ; D2.2.2@95.542,28.448 99.187,28.448 ; D2.3.2@95.542,44.704 99.187,44.704 ; 99.187,21.336 107.789,21.336 cw(c107.789,20.191) C53.1@108.934,20.191 ; C72.2@99.187,51.554 99.187,44.704 ; 99.187,28.448 99.187,44.704
CNTR1: CN6.4 CN9.6 R3.1.2 | length 116.1
  Component Side w0.4: R3.1.2@95.512,5.715 97.79,5.715 98.425,6.35 v1(98.425,9.017) ; v1(98.425,21.971) v1(98.425,24.384)
  Solder Side w0.4: CN9.6@39.497,66.167 43.18,69.85 55.499,69.85 60.96,64.389 75.057,64.389 79.883,59.563 85.344,59.563 89.281,55.626 93.853,55.626 96.266,53.213 98.425,51.054 v1(98.425,24.384) ; v1(98.425,9.017) v1(98.425,21.971)
CNTR2: CN6.3 CN9.5 R3.2.2 | length 94.9
  Component Side w0.4: v1(95.758,23.114) 95.766,23.106 R3.2.2@95.766,22.479
  Solder Side w0.4: CN9.5@36.957,66.167 36.957,65.786 39.116,63.627 53.213,63.627 58.166,58.674 74.422,58.674 78.124,54.972 92.602,54.972 93.726,53.848 93.726,51.562 96.52,48.768 96.52,38.608 95.758,37.846 v1(95.758,23.114)
CNTR3: CN6.2 CN9.4 R3.3.2 | length 80
  Component Side w0.4: v1@95.758,39.497 v1(95.766,39.497) R3.3.2@95.766,38.735
  Solder Side w0.4: CN9.4@34.417,66.167 37.719,62.865 52.832,62.865 57.785,57.912 74.168,57.912 80.645,51.435 90.043,51.435 91.186,52.578 CN6.2@91.186,53.213 ; CN6.2@91.186,52.832 92.71,51.308 92.71,48.514 95.766,45.458 v1(95.766,39.497)
CWKEY: C16.2 R5.1 | length 5.7
  Component Side w0.254: R5.1@55.719,55.444 v1(55.719,56.017) ; C16.2@59.021,55.444 v1(59.021,56.017)
  Solder Side w0.254: v1(55.719,56.017) 55.719,55.509 55.973,55.255 58.767,55.255 59.021,55.509 v1(59.021,56.017)